# Altium PCB PCB.PcbDoc
Units mil, origin at the board's own origin, x right, y up, seen from the top; angles counter-clockwise.
Board outline 6000 x 4000 mil, 2 copper layers (Top Layer, Bottom Layer); 19 components, 27 nets, 112 pads, 12 vias.
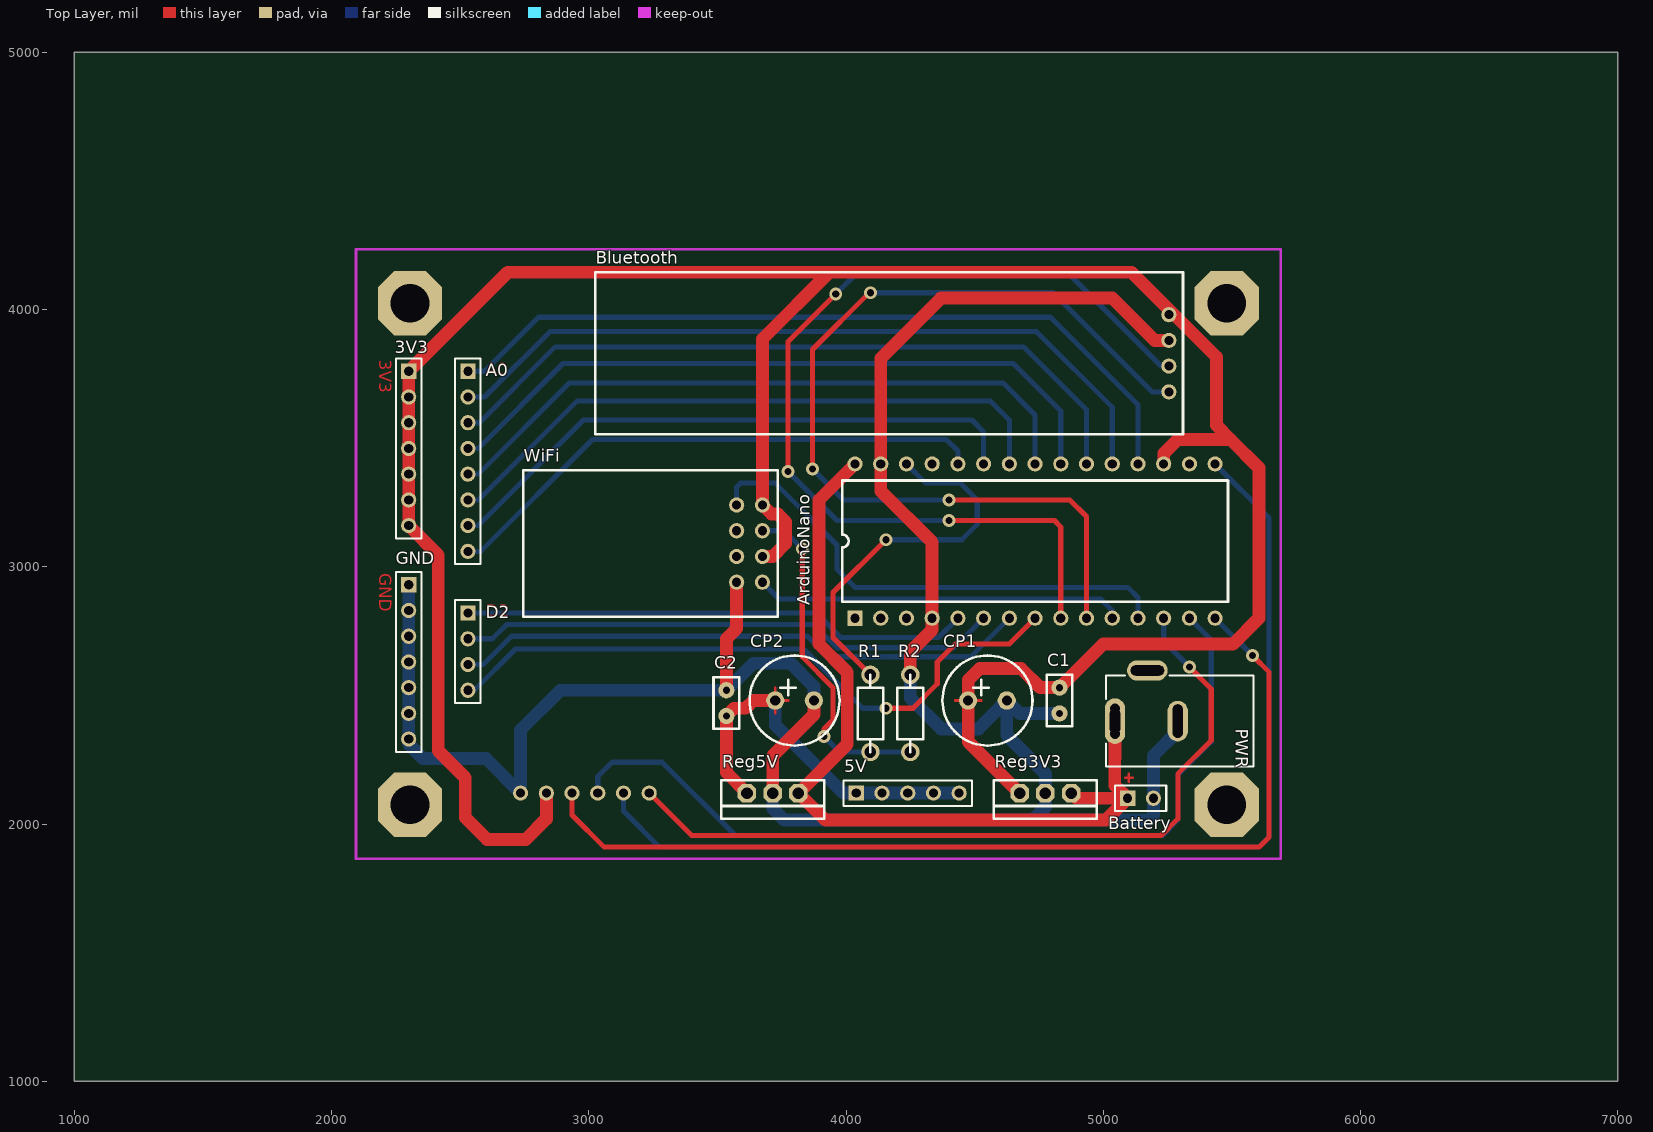
[diagram p0: Top Layer view]
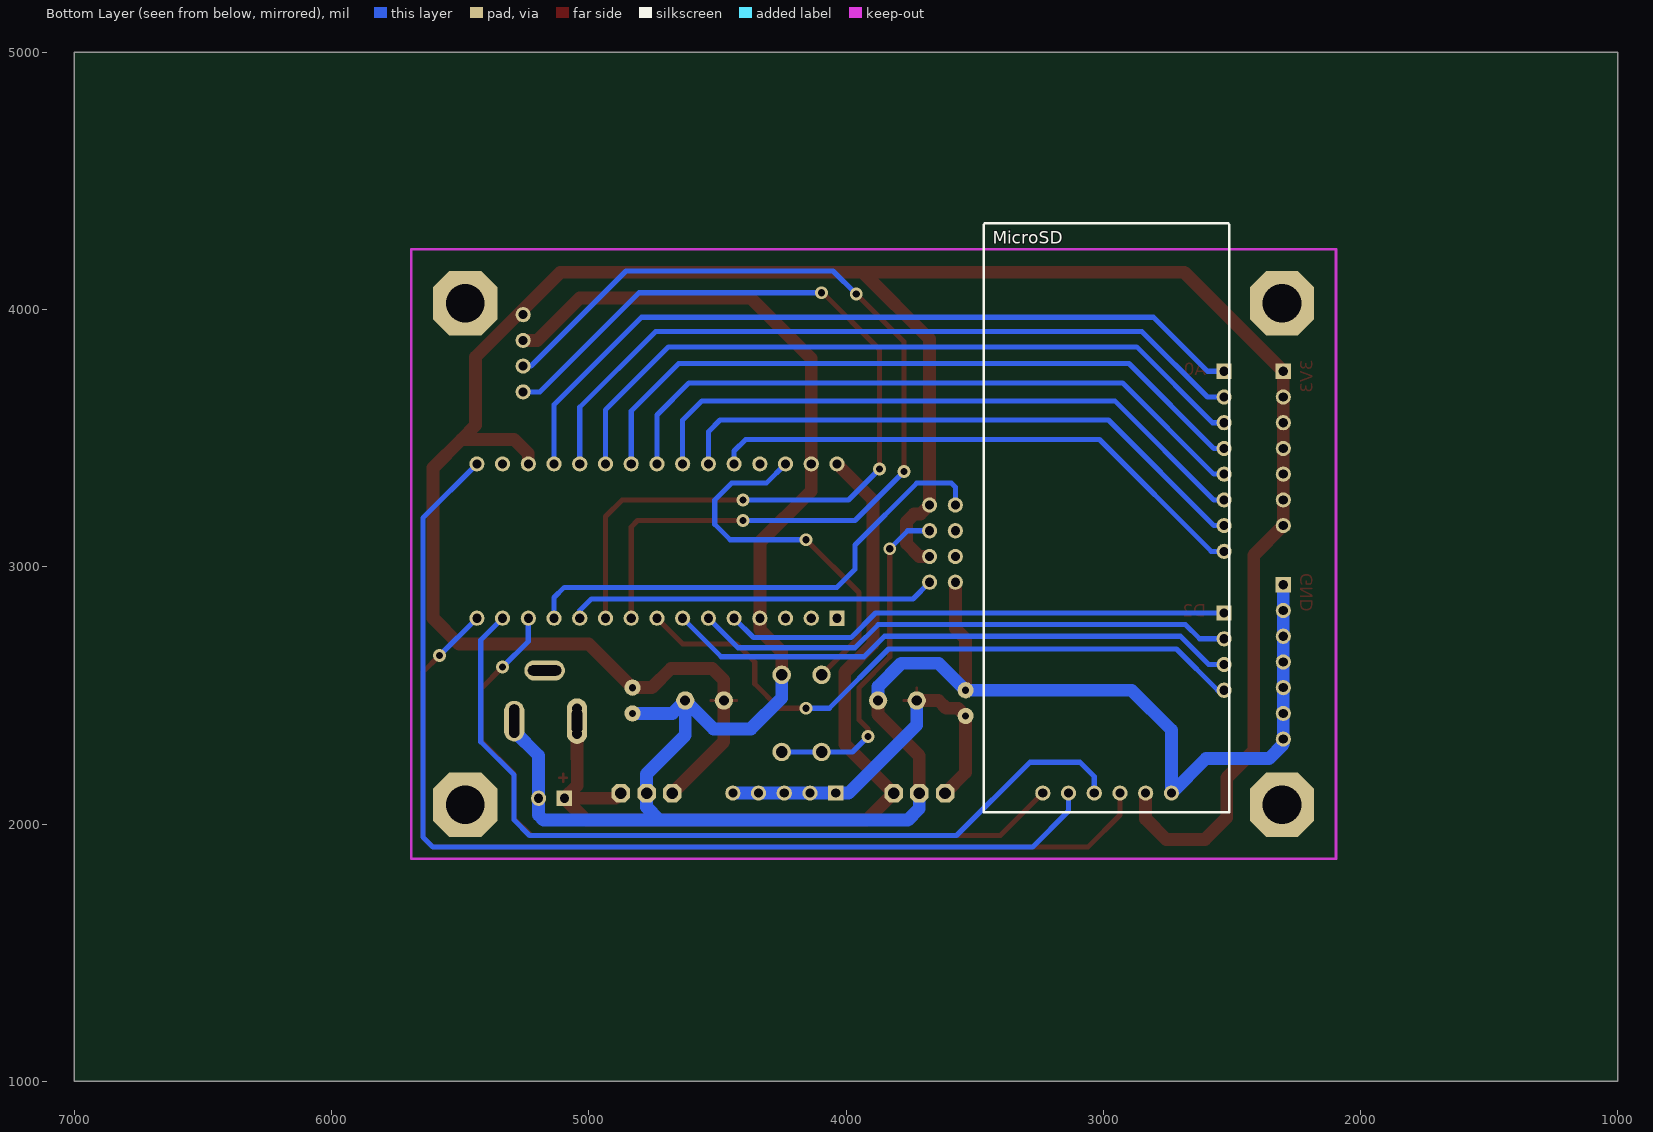
[diagram p1: Bottom Layer view, seen from below]

## Layer stack, top to bottom
Top Layer: signal copper 1.4
Dielectric: dielectric 12.6, FR-4, Dk 4.8
Bottom Layer: signal copper 1.4

## Board outline
1000,1000 7000,1000 7000,5000 1000,5000

## Design rules (kind name [scope] priority, off if disabled: settings)
Clearance [All] p1: gap=10
HoleSize [All] p1: absolutevalues=TRUE maxlimit=150 minlimit=1 maxpercent=80.000 minpercent=20.000
HoleToHoleClearance [All] p1: gap=0 allowstackedmicrovias=TRUE
NetAntennae [All] p1: netantennaetolerance=10
PolygonConnect [All] p1: connectstyle=Relief reliefconductorwidth=10 reliefentries=4 polygonreliefangle="90 Angle"
RoutingVias [All] p1: holewidth=28 width=50 viastyle="Through Hole" minholewidth=28 minwidth=50 maxholewidth=28 maxwidth=50
SilkscreenOverComponentPads [All] p1: minsilkscreentomaskgap=0
SolderMaskExpansion [All] p1: expansion=4
TestPointUsage [All] p1: valid=0 allowmultiple=FALSE
Testpoint [All] p1: side=15 testpointundercomponent=TRUE minsize=40 maxsize=100 preferedsize=60 minholesize=0 maxholesize=40 preferedholesize=32 testpointgrid=1 style=1023 order=0-112345678
Width [All] p1: maxlimit=50 minlimit=10 preferedwidth=20
20 further rules are at their usual default settings.

## Components (designator, comment, footprint, x,y, rotation, side; value= is the part's Value field where it differs from the comment)
3V3 "Header 7" HDR1X7 2300,3760 r270 top
5V "Header 5" HDR1X5 4040,2120 r0 top
A0 "Header 8" HDR1X8 2530,3760 r270 top
ArduinoNano "ArduinoNano3" Nano3 4035,2800 r90 top
Battery "Header 2" HDR1X2 5095,2100 r0 top
Bluetooth "HC-06" HC-06 5255,3680 r180 top
C1 "Disk Cap" C.1 4830,2530 r270 top
C2 "Disk Cap" C.1 3535,2420 r90 top
CP1 "Electrolytic Cap" PC.15 4475,2480 r0 top
CP2 "Electrolytic Cap" PC.15 3725,2480 r0 top
D2 "Header 4" HDR1X4 2530,2820 r270 top
GND "Header 7" HDR1X7 2300,2930 r270 top
MicroSD "MicroSD" MicroSD 3235,2120 r90 bottom
PWR "PWR2.5" KLD-0202 5585,2400 r180 top
R1 "R" R.3 4095,2280 r90 top
R2 "R" R.3 4250,2580 r270 top
Reg3V3 "LF33- Regulator" 78XX 4875,2120 r180 top
Reg5V "7805 - Regulator" 78XX 3815,2120 r180 top
WiFi "ESP8266" ESP8266Module 3675,2940 r180 top

## Footprints (in the part's own frame and the unit in brackets; to place one, negate y for a bottom-side part, rotate by r counter-clockwise, add the part's x,y. Pads: shape width x height; smd on the part's side, far side on the other; paste and mask are expansions set on the pad)
78XX [mil]
  oct 72x72 hole 45: 1(0,0) 2(100,0) 3(200,0)
  silkscreen extent -100,-50 300,100
C.1 [mil]
  round 63 hole 28: 1(0,0) 2(100,0)
  silkscreen extent -50,-50 150,50
ESP8266Module [mm]
  round 1.5 hole 0.9: 1(0,0) 2(0,-2.54) 3(0,-5.08) 4(0,-7.62) 5(2.54,-7.62) 6(2.54,-5.08) 7(2.54,-2.54) 8(2.54,0)
  silkscreen extent -1.52,-11.05 23.62,3.43
HC-06 [mm]
  round 1.5 hole 0.9: 1(0,0) 2(0,-2.54) 3(0,-5.08) 4(0,-7.62)
  silkscreen extent -1.4,-11.81 56.64,4.19
HDR1X2 [mm] "Connector; Header; 2 Position"
  rect 1.5x1.5 hole 0.9: 1(0,0)
  round 1.5 hole 0.9: 2(2.54,0)
  silkscreen extent -1.27,-1.27 3.81,1.27
HDR1X4 [mm] "Connector; Header; 4 Position"
  rect 1.5x1.5 hole 0.9: 1(0,0)
  round 1.5 hole 0.9: 2(2.54,0) 3(5.08,0) 4(7.62,0)
  silkscreen extent -1.27,-1.27 8.89,1.27
HDR1X5 [mm] "Connector; Header; 5 Position"
  rect 1.5x1.5 hole 0.9: 1(0,0)
  round 1.5 hole 0.9: 2(2.54,0) 3(5.08,0) 4(7.62,0) 5(10.16,0)
  silkscreen extent -1.27,-1.27 11.43,1.27
HDR1X7 [mm] "Connector; Header; 7 Position"
  rect 1.5x1.5 hole 0.9: 1(0,0)
  round 1.5 hole 0.9: 2(2.54,0) 3(5.08,0) 4(7.62,0) 5(10.16,0) 6(12.7,0) 7(15.24,0)
  silkscreen extent -1.27,-1.27 16.51,1.27
HDR1X8 [mm] "Connector; Header; 8 Position"
  rect 1.5x1.5 hole 0.9: 1(0,0)
  round 1.5 hole 0.9: 2(2.54,0) 3(5.08,0) 4(7.62,0) 5(10.16,0) 6(12.7,0) 7(15.24,0) 8(17.78,0)
  silkscreen extent -1.27,-1.27 19.05,1.27
KLD-0202 [mm] "DC Power Jack, 2.5mm, KLD Series, PCB Mount"
  oval 2x4.5 hole 1.002 slot 2.54 at 90 deg: 1(13.7,0)
  round 1.5 hole 1: 1A(13.7,-1.25) 1B(13.7,1.25) 2A(7.5,-1) 2B(7.5,1) 3A(9.5,-5) 3B(11.5,-5)
  oval 2x4 hole 1.002 slot 3.302 at 90 deg: 2(7.5,0)
  oval 4x2 hole 1.002 slot 3.302 at 0 deg: 3(10.5,-5)
  silkscreen extent 0,-4.5 14.6,4.5
MicroSD [mm]
  round 1.5 hole 0.9: 1(0,0) 2(0,-2.54) 3(0,-5.08) 4(0,-7.62) 5(0,-10.16) 6(0,-12.7)
  silkscreen extent -1.91,-18.42 56.26,5.84
Nano3 [mm]
  rect 1.5x1.5 hole 0.9: 1(0,0)
  round 1.5 hole 0.9: 2(0,-2.54) 3(0,-5.08) 4(0,-7.62) 5(0,-10.16) 6(0,-12.7) 7(0,-15.24) 8(0,-17.78) 9(0,-20.32) 10(0,-22.86) 11(0,-25.4) 12(0,-27.94) 13(0,-30.48) 14(0,-33.02) 15(0,-35.56) 16(15.24,-35.56) 17(15.24,-33.02) 18(15.24,-30.48) 19(15.24,-27.94) 20(15.24,-25.4) 21(15.24,-22.86) 22(15.24,-20.32) 23(15.24,-17.78) 24(15.24,-15.24) 25(15.24,-12.7) 26(15.24,-10.16) 27(15.24,-7.62) 28(15.24,-5.08) 29(15.24,-2.54) 30(15.24,0)
  silkscreen extent 1.64,-36.83 13.6,1.27
PC.15 [mil]
  round 71 hole 39: 1(0,0) 2(150,0)
  Top Layer lines w10: -50,0 0,0 ; 0,-50 0,0 ; 0,50 0,0 ; 50,0 0,0
  silkscreen extent -100,-175 250,175
R.3 [mil]
  round 72 hole 45: 1(0,0) 2(300,0)
  silkscreen extent 0,-50 300,50

## Part data
3V3 GND: library part "Header 5", "Header, 5-Pin"
5V: "Header, 5-Pin"
A0: "Header, 8-Pin"
Battery: "Header, 2-Pin"
C1 C2: library part C, "Capacitor"
CP1 CP2: library part CP, "Polarized Capacitor (Radial)"
D2: "Header, 4-Pin"
PWR: "Low Voltage Power Supply Connector"
R1 R2: "Resistor"
Reg3V3 Reg5V: library part Regulator, "Voltage Regulator"

## Free pads (board coordinates)
  oct 250x250 hole 150: 1(2305,4025) 2(2305,2075) 3(5480,2075) 4(5480,4025)

## Via types
v1: diameter 50, hole 28, Top Layer to Bottom Layer, 12 vias

## Nets (pads, with @x,y where several pads share a name; then routed paths per layer and width w, separated by ;. In a path a pad name is that pad's centre, name@x,y a point inside that pad or via, vN(x,y) a via of type N, cw(c..) or ccw(c..) an arc to the next point about the centre after c; other vN are vias at no path point)
A0: A0.1 ArduinoNano.19 | length 3062.8
  Bottom Layer w20: A0.1 2595,3760 2805,3970 4795,3970 5135,3630 ArduinoNano.19
A1: A0.2 ArduinoNano.20 | length 2952.8
  Bottom Layer w20: A0.2 2595,3660 2850,3915 4740,3915 5035,3620 ArduinoNano.20
A2: A0.3 ArduinoNano.21 | length 2838.7
  Bottom Layer w20: A0.3 2575,3560 2870,3855 4690,3855 4935,3610 ArduinoNano.21
A3: A0.4 ArduinoNano.22 | length 2723.3
  Bottom Layer w20: A0.4 2570,3460 2900,3790 4650,3790 4835,3605 ArduinoNano.22
A4: A0.5 ArduinoNano.23 | length 2593.8
  Bottom Layer w20: A0.5 2570,3360 2925,3715 4610,3715 4735,3590 ArduinoNano.23
A5: A0.6 ArduinoNano.24 | length 2465.5
  Bottom Layer w20: A0.6 2570,3260 2955,3645 4560,3645 4635,3570 ArduinoNano.24
A6: A0.7 ArduinoNano.25 | length 2318.5
  Bottom Layer w20: A0.7 2570,3160 2980,3570 4490,3570 4535,3525 ArduinoNano.25
A7: A0.8 ArduinoNano.26 | length 2153.8
  Bottom Layer w20: A0.8 2580,3060 3015,3495 4390,3495 4435,3450 ArduinoNano.26
D2: ArduinoNano.5 D2.1 | length 1975.4
  Bottom Layer w20: D2.1 3885,2820 3980,2725 4360,2725 ArduinoNano.5
D3: ArduinoNano.6 D2.2 | length 2112.7
  Bottom Layer w20: D2.2 2625,2720 2680,2775 3875,2775 3965,2685 4420,2685 ArduinoNano.6
D4: ArduinoNano.7 D2.3 | length 2245.8
  Bottom Layer w20: D2.3 2590,2620 2700,2730 3850,2730 3930,2650 4485,2650 ArduinoNano.7
D5: ArduinoNano.8 D2.4 | length 2561.3
  Top Layer w20: v1(4155,2450) 4260,2450 4355,2545 4355,2630 4425,2700 4635,2700 ArduinoNano.8
  Bottom Layer w20: D2.4 2555,2520 2715,2680 3835,2680 4065,2450 v1(4155,2450)
EXTPOWER: ArduinoNano.30 Battery.1 PWR.1 PWR.1A PWR.1B Reg3V3.1 Reg5V.1 | length 3430.2
  Top Layer w50: ArduinoNano.30 3895,3260 3895,2700 4005,2590 4005,2310 Reg5V.1 3920,2015 5010,2015 Battery.1 ; Reg3V3.1 4895,2100 Battery.1 ; PWR.1A@5045.63,2460 5045.63,2410.79 PWR.1 PWR.1B 5045.63,2255.63 5045,2255 5045,2150 Battery.1
GND: ArduinoNano.4 ArduinoNano.29 Battery.2 Bluetooth.3 C1.2 C2.2 CP1.2 CP2.2 GND.1 GND.2 GND.3 GND.4 GND.5 GND.6 GND.7 MicroSD.6 PWR.2 PWR.2A PWR.2B R2.1 Reg3V3.2 Reg5V.2 WiFi.8 | length 9520.2
  Top Layer w50: C2.2 3535,2720 3575,2760 WiFi.8 ; Reg5V.2 3715,2265 3875,2425 CP2.2 ; R2.1 4250,2670 4335,2755 ArduinoNano.4 4335,3095 4135,3295 ArduinoNano.29 4135,3810 4370,4045 5035,4045 5200,3880 Bluetooth.3
  Bottom Layer w50: GND.1 GND.2 GND.3 GND.4 GND.5 GND.6 GND.7 2300,2310 2355,2255 2600,2255 MicroSD.6 2735,2365 2890,2520 C2.2 3640,2625 3785,2625 3875,2535 CP2.2 ; Reg5V.2 3715,2060 3760,2015 4725,2015 ; R2.1 4250,2490 4370,2370 4515,2370 CP1.2 ; C1.2 4675,2430 CP1.2 ; PWR.2 PWR.2B 5195,2265.91 Battery.2 5195,2035 5175,2015 4725,2015 ; CP1.2 4625,2345 4775,2195 Reg3V3.2 4775,2065 4725,2015
MISO: ArduinoNano.15 MicroSD.4 | length 3800.3
  Top Layer w20: MicroSD.4 2935,2035 3060,1910 5605,1910 5645,1950 5645,2590 v1(5580,2655)
  Bottom Layer w20: ArduinoNano.15 v1(5580,2655)
MOSI: ArduinoNano.14 MicroSD.3 | length 3359.7
  Bottom Layer w20: MicroSD.3 3035,2185 3090,2240 3285,2240 3570,1955 5230,1955 5290,2015 5290,2190 5420,2320 5420,2715 ArduinoNano.14
NetPWR_3: PWR.3 PWR.3A PWR.3B
OUT5V: 5V.1 5V.2 5V.3 5V.4 5V.5 C2.1 CP2.1 Reg5V.3 | length 1467.8
  Top Layer w50: Reg5V.3 3535,2200 C2.1 3565,2450 3610,2450 3640,2480 CP2.1
  Bottom Layer w50: CP2.1 3725,2385 3990,2120 5V.1 5V.2 5V.3 5V.4 5V.5
RST-NANO: ArduinoNano.28 R1.2 | length 1477.8
  Top Layer w20: R1.2 3950,2725 3950,2900 v1(4155,3105)
  Bottom Layer w20: v1(4155,3105) 4450,3105 4510,3165 4510,3260 4445,3325 4310,3325 ArduinoNano.28
RST-WIFI: R1.1 R2.2 WiFi.3 | length 1338.1
  Top Layer w20: v1(3830,3070) 3830,2650 3950,2530 3950,2405 3915,2370 v1(3915,2340)
  Bottom Layer w20: WiFi.3 3760,3140 v1(3830,3070) ; v1(3915,2340) 3975,2280 R1.1 R2.2
RX-BT: ArduinoNano.10 Bluetooth.1 | length 3637.2
  Top Layer w20: v1(3870,3380) 3870,3845 v1@4090,4065 ; v1(4400,3260) 4870,3260 4935,3195 ArduinoNano.10
  Bottom Layer w20: v1(3870,3380) 3990,3260 v1(4400,3260) ; v1@4090,4065 4805,4065 5190,3680 Bluetooth.1
  other v1: 4095,4065
RX-WIFI: ArduinoNano.12 WiFi.5 | length 1956.2
  Bottom Layer w20: WiFi.5 3575,3310 3590,3325 3725,3325 3965,3085 3965,2990 4035,2920 5095,2920 5135,2880 ArduinoNano.12
SCK: ArduinoNano.16 MicroSD.2 | length 4191.5
  Bottom Layer w20: MicroSD.2 3135,2050 3275,1910 5605,1910 5645,1950 5645,3190 ArduinoNano.16
SS: ArduinoNano.13 MicroSD.1 | length 3060.7
  Top Layer w20: MicroSD.1 3400,1955 5225,1955 5290,2020 5290,2195 5420,2325 5420,2525 v1(5335,2610)
  Bottom Layer w20: ArduinoNano.13 5235,2710 v1(5335,2610)
TX-BT: ArduinoNano.9 Bluetooth.2 | length 3756.2
  Top Layer w20: v1(3775,3370) 3775,3875 v1(3960,4060) ; v1(4400,3180) 4810,3180 4835,3155 ArduinoNano.9
  Bottom Layer w20: v1(3775,3370) 3965,3180 v1(4400,3180) ; v1(3960,4060) 4050,4150 4855,4150 5225,3780 Bluetooth.2
TX-WIFI: ArduinoNano.11 WiFi.1 | length 1435.6
  Bottom Layer w20: WiFi.1 3740,2875 4990,2875 5035,2830 ArduinoNano.11
VCC: 3V3.1 3V3.2 3V3.3 3V3.4 3V3.5 3V3.6 3V3.7 ArduinoNano.18 Bluetooth.4 C1.1 CP1.1 MicroSD.5 Reg3V3.3 WiFi.2 WiFi.4 | length 10291.5
  Top Layer w50: MicroSD.5 2835,2020 2755,1940 2605,1940 2520,2025 2520,2180 2415,2285 2415,3045 3V3.7 3V3.6 3V3.5 3V3.4 3V3.3 3V3.2 3V3.1 2685,4145 3935,4145 ; WiFi.2 3715,3040 3765,3090 3765,3175 3735,3205 3710,3205 WiFi.4 3675,3885 3935,4145 ; Reg3V3.3 4475,2320 CP1.1 4475,2560 4520,2605 4680,2605 4755,2530 C1.1 5000,2700 5505,2700 5605,2800 5605,3385 5495,3495 ; ArduinoNano.18 5235,3440 5290,3495 5495,3495 ; 3935,4145 5110,4145 5440,3815 5440,3550 5495,3495
pads on no net: ArduinoNano.1 ArduinoNano.2 ArduinoNano.3 ArduinoNano.17 ArduinoNano.27 WiFi.6 WiFi.7
copper on no net: | length 60
  Top Layer w10: 5085,2180 5115,2180 ; 5100,2165 5100,2195

## Keep-outs
Keep-Out Layer:
  lines w10: 2095,1865 2095,4235 5690,4235 5690,1865 2095,1865

## Other copper
Top Layer:
  text "3V3" at 2185,3805 h48 r270
  text "A0" at 2600,3745 h48
  text "GND" at 2185,2975 h48 r270
  text "D2" at 2600,2805 h48